# Altium PCB ProxSensorType1_V2.PcbDoc
Units mil, origin at the board's own origin, x right, y up, seen from the top; angles counter-clockwise.
Board outline 1600 x 2000 mil, 2 copper layers (Top Layer, Bottom Layer); 28 components, 23 nets, 78 pads, 0 vias.
Unrouted connection lines stored in the file: 55.
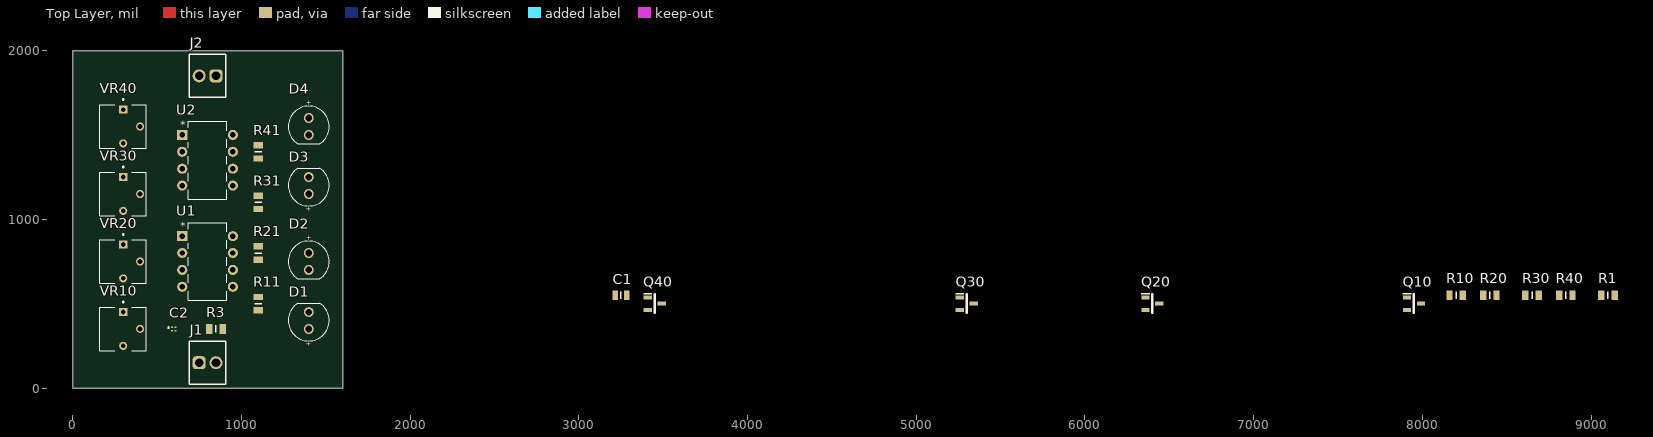
[diagram p0: Top Layer view]
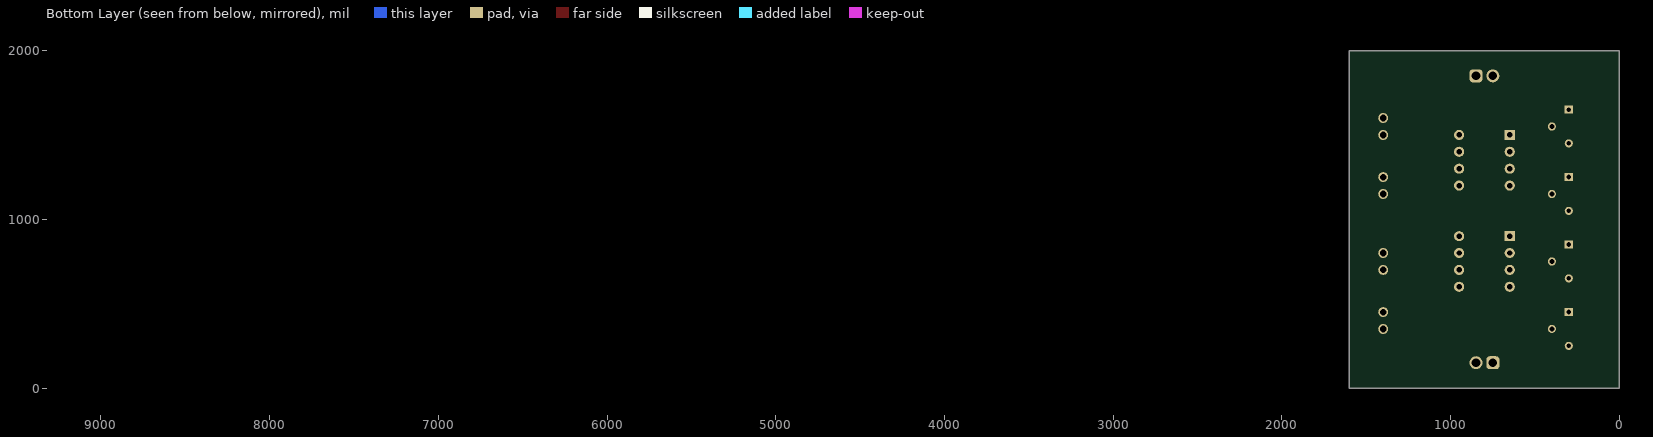
[diagram p1: Bottom Layer view, seen from below]

## Layer stack, top to bottom
Top Solder: solder mask 0.4, Solder Resist, Dk 3.5
Top Layer: signal copper 1.4
Dielectric 1: dielectric 12.6, FR-4, Dk 4.8
Bottom Layer: signal copper 1.4
Bottom Solder: solder mask 0.4, Solder Resist, Dk 3.5

## Board outline
0,0 1600,0 1600,2000 0,2000

## Design rules (kind name [scope] priority, off if disabled: settings)
Clearance [All] p1: gap=10 ignorepadtopadclearanceinfootprint=FALSE except(0: Arc-Hole Track-Hole SMDPad-Hole THPad-Hole Via-Hole Fill-Hole Poly-Hole Region-Hole Text-Hole)
PolygonConnect [All] p1: connectstyle=Relief reliefconductorwidth=10 reliefentries=4 polygonreliefangle="90 Angle" airgapwidth=10
RoutingVias [All] p1: holewidth=28 width=50 viastyle="Through Hole" minholewidth=28 minwidth=50 maxholewidth=28 maxwidth=50
SolderMaskExpansion [All] p1: expansion=4 istentingtop=FALSE
Width [All] p1: maxlimit=10 minlimit=10 preferedwidth=10
30 further rules are at their usual default settings.

## Components (designator, comment, footprint, x,y, rotation, side; value= is the part's Value field where it differs from the comment)
C1 "TMK212BBJ106MG-T" CAPC2012X65N 3250,550 r0 top
C2 "LXRW0YV900-053" LXRW-0Y_MUR-M 600,350 r0 top
D1 "Super Red, 2.1V, 40°" WL-TMRC_D5.9H8.7 1400,400 r90 top
D2 "Super Red, 2.1V, 40°" WL-TMRC_D5.9H8.7 1399.99,750.01 r270 top
D3 "Super Red, 2.1V, 40°" WL-TMRC_D5.9H8.7 1400,1200 r90 top
D4 "Super Red, 2.1V, 40°" WL-TMRC_D5.9H8.7 1400,1550 r270 top
J1 "691210910002" 691210910002 800,150 r0 top
J2 "691210910002" 691210910002 800,1850 r180 top
Q10 "MMBFJ309LT1G" SOT96P237X111-3N 7950,500 r0 top
Q20 "MMBFJ309LT1G" SOT96P237X111-3N 6400,500 r0 top
Q30 "MMBFJ309LT1G" SOT96P237X111-3N 5300,500 r0 top
Q40 "MMBFJ309LT1G" SOT96P237X111-3N 3450,500 r0 top
R1 "4,7k" RESC2012X50N 9100,550 r0 top
R3 "10k" RESC2012X50N 850,350 r0 top
R10 "4,7k" RESC2012X50N 8200,550 r0 top
R11 "12k" RESC2012X50N 1100,500 r90 top
R20 "4,7k" RESC2012X50N 8400,550 r0 top
R21 "12k" RESC2012X50N 1100,800 r90 top
R30 "4,7k" RESC2012X50N 8650,550 r0 top
R31 "12k" RESC2012X50N 1100,1100 r90 top
R40 "4,7k" RESC2012X50N 8850,550 r0 top
R41 "12k" RESC2012X50N 1100,1400 r90 top
U1 "LM358" DIP8_300 950,600 r0 top
U2 "LM358" DIP8_300 950,1200 r0 top
VR10 "3362P-1-253LF" TRIM_3362P-1-253LF 300,350 r270 top
VR20 "3362P-1-253LF" TRIM_3362P-1-253LF 300,750 r270 top
VR30 "3362P-1-253LF" TRIM_3362P-1-253LF 300,1150 r270 top
VR40 "3362P-1-253LF" TRIM_3362P-1-253LF 300,1550 r270 top

## Footprints (in the part's own frame and the unit in brackets; to place one, negate y for a bottom-side part, rotate by r counter-clockwise, add the part's x,y. Pads: shape width x height; smd on the part's side, far side on the other; paste and mask are expansions set on the pad)
691210910002 [mm] "2,54mm - modular - green - Horizontal wire entry - Cage clamp - 0,8mm2 wires - 02p"
  rrect50% 1.95x1.95 hole 1.3: 1(-1.27,0)
  round 1.95 hole 1.3: 2(1.27,0)
  silkscreen extent -2.74,-3.25 2.74,3.25, body extent -2.74,-3.25 2.74,3.25, height 8.55
CAPC2012X65N [mm]
  rect 0.83x1.39 smd: 1(-0.86,0) 2(0.86,0)
  silkscreen extent 0,-0.53 0,0.53, body extent -1,-0.63 1,0.63, height 0.65
DIP8_300 [mil]
  rect 60x60 hole 32: 1(-300,300)
  round 60 hole 32: 2(-300,200) 3(-300,100) 4(-300,0) 5(0,0) 6(0,100) 7(0,200) 8(0,300)
  silkscreen extent -265,-80 -35,380, body extent -315,-75 5,375, height 205
LXRW-0Y_MUR-M [mil]
  rect 11x9 smd paste+0 mask+0: 1(-10,10) 2(-10,-10) 3(10,-10) 4(10,10)
  silkscreen extent -35,4 -27,12, body extent -13,-13 13,13, height 12
RESC2012X50N [mm]
  rect 0.95x1.45 smd: 1(-1,0) 2(1,0)
  silkscreen extent 0,-0.53 0,0.53, body extent -1.02,-0.63 1.02,0.63, height 0.5
SOT96P237X111-3N [mm]
  rect 1.25x0.6 smd: 1(-1.05,0.955) 2(-1.05,-0.955) 3(1.05,0)
  silkscreen extent -1.68,-1.46 0.08,1.51, body extent -1.18,-1.46 1.18,1.46, height 1.11
TRIM_3362P-1-253LF [mil]
  rect 48.11x48.11 hole 28.11: 1(-100,0)
  round 48.11 hole 28.11: 2(0,100) 3(100,0)
  silkscreen extent -164,-139 130,137, body extent -61,-31 61,31, height 26
WL-TMRC_D5.9H8.7 [mm] "THT Mono-color Round Color LED, 2-leads"
  round 1.5 hole 1: 1(-1.27,0) 2(1.27,0)
  silkscreen extent -3.07,-3.07 2.58,3.08, body extent -2.95,-2.95 2.45,2.95, height 9.2

## Part data
C1: "Capacitor", Manufacturer_Name="TAIYO YUDEN", Mouser Part Number=963-TMK212BBJ106MG-T, Datasheet Link=https://ds.yuden.co.jp/TYCOMPAS/ut/download?pn=LMK063BBJ474MPLF&fileType=CA, Height=1.45mm, Manufacturer_Part_Number=TMK212BBJ106MG-T, Mouser Price/Stock=https://www.mouser.co.uk/ProductDetail/Taiyo-Yuden/TMK212BBJ106MG-T?qs=lkMpTOwszhd%2F%252Bg1AlFV9dw%3D%3D
C2: "Cap trimmer (variable capacitor)", Mfr_Name=Murata, Copyright="Copyright (C) 2023 Ultra Librarian. All rights reserved.", Digi-Key_Part_Number_1=490-18380-2-ND, Digi-Key_Part_Number_2=490-18380-1-ND, Digi-Key_Part_Number_3=490-18380-6-ND, Manufacturer_Part_Number=LXRW0YV900-053, RefDes=RefDes, Type=DEV
D1 D2 D3 D4: library part LED_151051SS04000, "WL-TMRC Mono-color Round Color, THT, D5.9 x H8.7mm, Super Red, 2.1V, 40°", Case/Size Code=5mm, Emitting Color="Super Red", Forward Voltage=2.1V, Manufacturer="Wurth Elektronik", Manufacturer Part Number=151051SS04000, Operating Temperature Max=85°C, Operating Temperature Min=-40°C, Category="Signal LEDs", Chip Technology=AlInGaP, ComponentLink1Description="Website Link", ComponentLink1URL=https://www.we-online.com/redexpert/article/151051SS04000?ad, ComponentLink2Description="Datasheet Link", ComponentLink2URL=https://www.we-online.com/redexpert/spec/151051SS04000?ad, Diameter=5.9mm, Dominant Wavelength=635nm, Height=8.7mm, Luminous Intensity=250mcd, Match Code=WL-TMRC, Mount="Through Hole", Packaging=Bulk, Peak Wavelength=640nm, Viewing Angle=40°
J1 J2: "WR-TBL Series 2109 Horizontal Entry, THT, pitch 2.54mm, 2p", Manufacturer="Wurth Elektronik", Operating Temperature Max=105°C, Operating Temperature Min=-40°C, Rated Current=6A, Working Voltage=150V, Application="Rising Cage Clamp", Category="Terminal Blocks", ComponentLink1Description="Website Link", ComponentLink1URL=https://www.we-online.com/redexpert/article/691210910002?ad, ComponentLink2Description="Datasheet Link", ComponentLink2URL=https://www.we-online.com/redexpert/spec/691210910002?ad, Manufacturer Part Number=691210910002, Match Code=WR-TBL, Modularity=No, Mount="Through Hole", Number of Pins=2, Number of Rows=1, Orientation=Horizontal, Packaging=Box, Pitch=2.54mm
Q10 Q20 Q30 Q40: "Transistor", Manufacturer_Name=onsemi, Mouser Part Number=863-MMBFJ309LT1G, Arrow Part Number=MMBFJ309LT1G, Arrow Price/Stock=https://www.arrow.com/en/products/mmbfj309lt1g/on-semiconductor, Datasheet Link=http://www.onsemi.com/pub/Collateral/MMBFJ309LT1-D.PDF, Height=1.11mm, Manufacturer_Part_Number=MMBFJ309LT1G, Mouser Price/Stock=https://www.mouser.co.uk/ProductDetail/onsemi/MMBFJ309LT1G?qs=HVbQlW5zcXXpftXEfcBAsg%3D%3D
R1 R10 R20 R30 R40: library part "RESISTOR 0805", "4,7k Resistor 0805", Manufacturer="Vishay Dale", Part Number=TNPW080510K0BETA
R3: library part "RESISTOR 0805", "10k Resistor 0805", Manufacturer="Vishay Dale", Part Number=TNPW080510K0BETA
R11 R21 R31 R41: library part "RESISTOR 0805", "12k Resistor 0805", Manufacturer="Vishay Dale", Part Number=TNPW080510K0BETA
U1 U2: "Texas instruments LM358 opamp", Mfr_Name="Texas Instruments", Copyright="Copyright (C) 2023 Ultra Librarian. All rights reserved.", Manufacturer_Part_Number=LM358, RefDes=RefDes, Type=DEV
VR10 VR20 VR30 VR40: "25 kOhms 0.5W, 1/2W PC Pins Through Hole Trimmer Potentiometer Cermet 1 Turn Top Adjustment", Package="3116 Bourns", Availability=Good, Check_prices=https://www.snapeda.com/parts/3362P-1-253LF/Bourns/view-part/493663/?ref=eda, MF=Bourns, MP=3362P-1-253LF, Price=None, Purchase-URL=https://pricing.snapeda.com/search/part/3362P-1-253LF/?ref=eda, SnapEDA_Link=https://www.snapeda.com/parts/3362P-1-253LF/Bourns/view-part/493663/?ref=snap

## Nets (pads, with @x,y where several pads share a name; then routed paths per layer and width w, separated by ;. In a path a pad name is that pad's centre, name@x,y a point inside that pad or via, vN(x,y) a via of type N, cw(c..) or ccw(c..) an arc to the next point about the centre after c; other vN are vias at no path point)
+12: J2.1 R1.2 R10.2 R20.2 R30.2 R40.2 U1.8 U2.8
GND: C2.1 D1.2 D2.2 D3.2 D4.2 J2.2 R3.1 U1.4 U2.4
NetC1_1: C1.1 C2.2
NetC1_2: C1.2 Q10.3 Q20.3 Q30.3 Q40.3
NetC2_3: C2.3 J1.2
NetC2_4: C2.4 J1.1
NetD1_1: D1.1 R11.1
NetD2_1: D2.1 R21.1
NetD3_1: D3.1 R31.1
NetD4_1: D4.1 R41.1
NetQ10_1: Q10.1 VR10.1
NetQ10_2: Q10.2 R10.1 U1.2
NetQ20_1: Q20.1 VR20.1
NetQ20_2: Q20.2 R20.1 U1.6
NetQ30_1: Q30.1 VR30.1
NetQ30_2: Q30.2 R30.1 U2.2
NetQ40_1: Q40.1 VR40.1
NetQ40_2: Q40.2 R40.1 U2.6
NetR1_1: R1.1 R3.2 U1.3 U1.5 U2.3 U2.5 VR10.2 VR10.3 VR20.2 VR20.3 VR30.2 VR30.3 VR40.2 VR40.3
NetR11_2: R11.2 U1.1
NetR21_2: R21.2 U1.7
NetR31_2: R31.2 U2.1
NetR41_2: R41.2 U2.7

## Text inside footprints (layer, text, board x,y; h text height)
D1: Top Overlay "+" at 1412.99,240.55 h31.5 r90
D2: Top Overlay "+" at 1387,909.46 h31.5 r270
D3: Top Overlay "+" at 1412.99,1040.55 h31.5 r90
D4: Top Overlay "+" at 1387.01,1709.45 h31.5 r270
U1: Top Overlay "*" at 637.5,935 h50; Mechanical 13 "*" at 687.5,875 h50
U2: Top Overlay "*" at 637.5,1535 h50; Mechanical 13 "*" at 687.5,1475 h50